# EAGLE board tetris_mega_4 (EAGLE 6.2)

Size 44 x 50 mm. Coordinates in mm from the lower left corner, seen from the top.
Outline: 0,47.46 0,2.54 arc90 2.54,0 41.46,0 arc90 44,2.54 44,17.46 arc90 41.46,20 32,20 32,47.46 arc90 29.46,50 2.54,50 arc90 0,47.46
Copper layers (1*16): Top 0.035mm / dielectric 1.5mm / Bottom 0.035mm
Design rules: minimum track width 10mil, minimum drill 12mil, track to track 7mil, track to pad 7mil, pad to pad 7mil, via to via 7mil, smd to smd 0mil, copper to edge 10mil, drill to drill 10mil, minimum pad ring 10mil, minimum via ring 6mil, stop-mask expansion 2mil, vias tented up to drill 100mil, thermal gap 10mil

## Footprints (pad centres in the part's own frame; a part is rotated, then mirrored left to right if it is on the bottom)
CPOL-RADIAL-10UF-25V = drill 0.7 pad 1.651 square: 1 1.27,0 | drill 0.7 pad 1.651: 2 -1.27,0
CAP-PTH-SMALL = drill 0.7 pad 1.651: 1 0,0; 2 2.54,0
DIL28-3 = drill 0.813 long: 1 -16.51,-3.81; 2 -13.97,-3.81; 3 -11.43,-3.81; 4 -8.89,-3.81; 5 -6.35,-3.81; 6 -3.81,-3.81; 7 -1.27,-3.81; 8 1.27,-3.81; 9 3.81,-3.81; 10 6.35,-3.81; 11 8.89,-3.81; 12 11.43,-3.81; 13 13.97,-3.81; 14 16.51,-3.81; 15 16.51,3.81; 16 13.97,3.81; 17 11.43,3.81; 18 8.89,3.81; 19 6.35,3.81; 20 3.81,3.81; 21 1.27,3.81; 22 -1.27,3.81; 23 -3.81,3.81; 24 -6.35,3.81; 25 -8.89,3.81; 26 -11.43,3.81; 27 -13.97,3.81; 28 -16.51,3.81
AVR-ISP-6R = drill 1.016 square: 1 -2.54,-1.27 | drill 1.016 octagon: 2 -2.54,1.27; 3 0,-1.27; 4 0,1.27; 5 2.54,-1.27; 6 2.54,1.27
TACTILE-PTH = drill 1.016 pad 1.88: 1 -3.251,2.261; 2 3.251,2.261; 3 -3.251,-2.261; 4 3.251,-2.261
SOT23-5 = smd 0.55 x 1.2: 1 -0.95,-1.3; 2 0,-1.3; 3 0.95,-1.3; 4 0.95,1.3; 5 -0.95,1.3
LD788BS-SS22 = drill 0.7 pad 1.422: A1 -7.5,8.75; A2 -7.5,1.25; A3 -7.5,-3.75; A4 7.5,8.75; A5 7.5,6.25; A6 7.5,1.25; A7 7.5,-6.25; A8 7.5,-8.75; C1 -7.5,6.25; C2 -7.5,3.75; C3 -7.5,-1.25; C4 -7.5,-6.25; C5 -7.5,-8.75; C6 7.5,3.75; C7 7.5,-1.25; C8 7.5,-3.75
D-7.5 = drill 0.813 long: A 2.81,0; C -3,0
ISK4.1K_I-80450RF_I2G = drill 0.5 pad 1.93 square: P$1 -7.303,0; P$2 7.303,0
NICHICON_10X30 = drill 1.2 pad 2.54 square: P$1 2.75,-1.75 | drill 1.2 pad 2.54: P$2 9.25,-1.75
R-6 = drill 0.8: P$1 -3,0; P$2 3,0
SWITCH = drill 0.6: 1 2.25,6.25; 2 2.25,4.25; 3 2.25,2.25 | drill 1.2 square: C1 2.25,8.5; C2 2.25,0
USB-MICROB = smd 0.4 x 2: D+ 0,3.1; D- -0.65,3.1; GND 1.3,3.1; ID 0.65,3.1; VBUS -1.3,3.1 | smd 1.8 x 1.9: GND@2 -4,0.15; GND@3 4,0.15
USB-MINIB-OLD = smd 2.5 x 2: 1 -3,-4.5; 2 -3,4.5 | smd 3.5 x 2: 3 3,-4.5; 4 3,4.5 | smd 3.5 x 0.5: D+ 3,0; D- 3,0.8; GND 3,-1.6; ID 3,-0.8; VBUS 3.01,1.61 | hole 0.9: 0,2.2; 0,-2.2

## Placement (x,y rotation side)
C1  [CPOL-RADIAL-10UF-25V]  22,14.5 180 bottom
C2  [CAP-PTH-SMALL]  26,35 90 bottom
IC1  MEGA8-P  [DIL28-3]  6,29 270 top
JP1  AVR-ISP-6R  [AVR-ISP-6R]  22,9.5 0 bottom
S6  [TACTILE-PTH]  13,5 270 top
S7  [TACTILE-PTH]  5,4.5 180 top
S8  [TACTILE-PTH]  31,5 270 top
S9  [TACTILE-PTH]  39,4.5 180 top
U1  V_REG_LDOSMD  [SOT23-5]  34.5,11 90 bottom
U$1  LD788BS-SS22  [LD788BS-SS22]  22,19.5 0 top
U$2  LD788BS-SS22  [LD788BS-SS22]  22,39.5 0 top
U$3  D-6  [D-7.5]  5,9 0 top
U$4  I-80450RF  [ISK4.1K_I-80450RF_I2G]  22,25.5 270 bottom
U$5  NICHICON_12F  [NICHICON_10X30]  32.25,19.86 0 top
U$6  R-6  [R-6]  27,14.5 90 bottom
U$7  R-6  [R-6]  17,14.5 270 bottom
U$8  SWITCH  [SWITCH]  36,8.5 0 top
U$13  [LOGO]  6,28 0 bottom
U$14  [LOGO]  22,25.5 0 top
X1  USB-MICROB  [USB-MICROB]  22,1.5 0 top
X3  USBOLD  [USB-MINIB-OLD]  22,44 270 bottom

## Library data of the parts
C1 C2 S6-S9 U1 X1 X3 = SparkFun
IC1 = atmel; OC_FARNELL: unknown; OC_NEWARK: unknown
JP1 = avr-5-4.16
U$1-U$8 = mrule
U$13 U$14 = mrule2

## Nets
N$1: IC1.17 JP1.4 S8.1 S8.2 U$1.A4 U$2.C1
N$2: IC1.3 U$1.A5 U$2.C2
N$3: IC1.2 U$1.C6 U$2.A2
N$4: IC1.26 U$1.A6 U$2.C3
N$5: IC1.9 U$1.C7 U$2.A3
N$6: IC1.24 U$1.A7 U$2.C4
N$7: IC1.23 U$1.A8 U$2.C5
N$8: IC1.25 U$1.C8 U$2.A1
N$9: U$5.P$2 U$6.P$1 U$8.2
N$10: IC1.15 U$1.C2 U$2.A5
N$11: IC1.14 U$1.A2 U$2.C6
N$12: IC1.13 U$1.C3 U$2.A6
N$13: IC1.12 U$1.A3 U$2.C7
N$14: IC1.11 U$1.A1 U$2.C8
N$15: IC1.6 U$1.C4 U$2.A7
N$16: IC1.18 JP1.1 S9.1 S9.2 U$1.C5 U$2.A8
N$17: C1.2 IC1.10 IC1.22 U$4.P$1
N$18: IC1.19 JP1.3 S6.3 S6.4 S7.3 S7.4 S8.3 S8.4 S9.3 S9.4
N$19: IC1.5
N$20: IC1.27 S6.1 S6.2
N$21: U$3.C U$8.3
N$22: IC1.8 JP1.6 U$3.A U$4.P$2
N$23: U1.2 X1.VBUS X3.VBUS
N$24: U1.1 U$6.P$2 X1.GND X3.GND
N$25: X1.D-
N$26: C1.1 C2.2 IC1.7 IC1.20 IC1.21 JP1.2 U$7.P$2
N$27: IC1.4
N$28: IC1.16 U$1.C1 U$2.A4
N$29: C2.1 IC1.1 JP1.5 U$7.P$1
N$30: X1.D+ X3.D+
N$31: IC1.28 S7.1 S7.2
S$2: U1.3 U$5.P$1

## Tracks (layer width: path | path; a pad name or v marks a point on that pad's centre or on a via)
N$1  (5 unrouted)
N$2  (2 unrouted)
N$3  (2 unrouted)
N$4  (2 unrouted)
N$5  (2 unrouted)
N$6  (2 unrouted)
N$7  (2 unrouted)
N$8  (2 unrouted)
N$9  (2 unrouted)
N$10  (2 unrouted)
N$11  (2 unrouted)
N$12  (2 unrouted)
N$13  (2 unrouted)
N$14  (2 unrouted)
N$15  (2 unrouted)
N$16  (5 unrouted)
N$17  (3 unrouted)
N$18  (9 unrouted)
N$20  (2 unrouted)
N$21  (1 unrouted)
N$22  (3 unrouted)
N$23  (2 unrouted)
N$24  (3 unrouted)
N$26  (6 unrouted)
N$28  (2 unrouted)
N$29  (3 unrouted)
N$30  (1 unrouted)
N$31  (2 unrouted)
S$2  (1 unrouted)

## Text on the board
tPlace: + | -
bPlace: 61566 | 10k | R_limit | Treehouse, AS220 Labs | Michael Everett Rule